# EAGLE board 2016-09-29 (EAGLE 6.6.0)
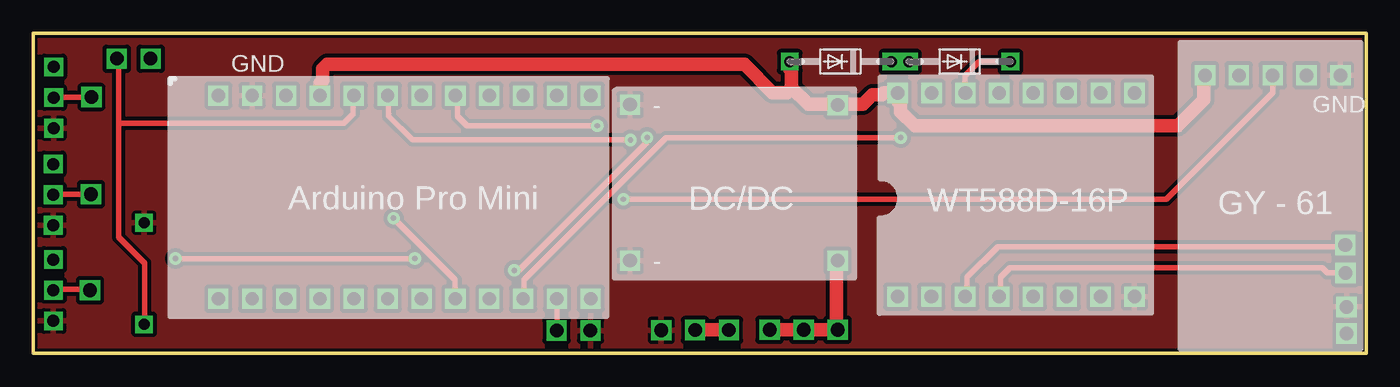
[diagram p0: board, top side]
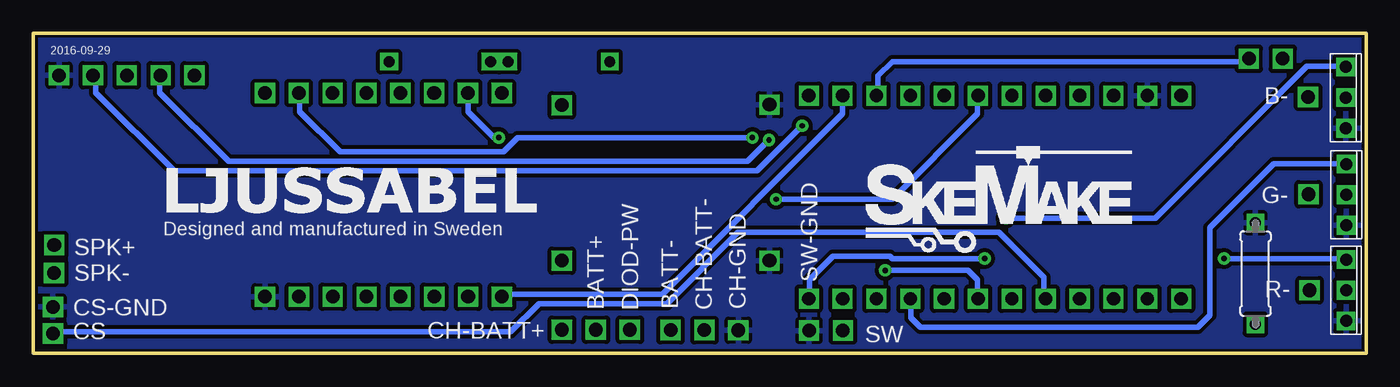
[diagram p1: board, bottom side, seen from below]

Size 100 x 24 mm. Coordinates in mm from the lower left corner, seen from the top.
Outline: 0,0 0,24 100,24 100,0 0,0
Copper layers (1*16): Top 0.035mm / dielectric 1.5mm / Bottom 0.035mm
Design rules "default *": minimum track width 8mil, minimum drill 16mil, track to track 8mil, track to pad 8mil, pad to pad 8mil, via to via 8mil, smd to smd 8mil, copper to edge 8mil, drill to drill 25mil, minimum pad ring 10mil, minimum via ring 10mil, stop-mask expansion 4mil, vias tented up to drill 0mil, thermal gap 10mil
Net classes: 0 default: width 0.406 mm, clearance 0.305 mm; 1 supply: width 1.016 mm, clearance 0.305 mm

## Footprints (pad centres in the part's own frame; a part is rotated, then mirrored left to right if it is on the bottom)
TO-251 = drill 0.9 square: D_2 1.15,3.3; G_1 1.15,5.6; S_3 1.15,1
1X01 = drill 1.016 square: 1 0,0
DO34-7 = drill 0.813 square: A 3.81,0; C -3.81,0
1X08 = drill 1.016 square: 1 -8.89,0; 2 -6.35,0; 3 -3.81,0; 4 -1.27,0; 5 1.27,0; 6 3.81,0; 7 6.35,0; 8 8.89,0
1X02 = drill 1.016 square: 1 -1.27,0; 2 1.27,0
1X05 = drill 1.016 square: 1 -5.08,0; 2 -2.54,0; 3 0,0; 4 2.54,0; 5 5.08,0
0207/7 = drill 0.813 square: 1 -3.81,0; 2 3.81,0
PRO-MINI-2 = drill 1 square: A0 6.35,-5.08; A1 6.35,-2.54; A2 6.35,0; A3 6.35,2.54; D2 -8.89,2.54; D3 -8.89,0; D4 -8.89,-2.54; D5 -8.89,-5.08; D6 -8.89,-7.62; D7 -8.89,-10.16; D8 -8.89,-12.7; D9 -8.89,-15.24; D10 6.35,-15.24; D11 6.35,-12.7; D12 6.35,-10.16; D13 6.35,-7.62; GND 6.35,10.16; GND1 -8.89,5.08; RAW 6.35,12.7; RST 6.35,7.62; RST1 -8.89,7.62; RX1 -8.89,10.16; TX0 -8.89,12.7; VCC 6.35,5.08

## Placement (x,y rotation side)
B  TO-251TH  [TO-251]  2.68,15.88 0 bottom
B-  [1X01]  4.36,19.23 0 top
BATT+  [1X01]  57.79,1.77 0 top
BATT-  [1X01]  52.19,1.74 0 top
CH-BATT+  [1X01]  60.34,1.77 0 top
CH-BATT-  [1X01]  49.65,1.74 0 top
CH-GND  [1X01]  47.11,1.73 0 top
CS  [1X01]  98.53,1.48 0 top
CS-GND  [1X01]  98.53,3.48 0 top
D1  BAT81  [DO34-7]  60.56,21.88 180 top
D2  BAT81  [DO34-7]  69.5,21.88 180 top
DCDC-GND  [1X01]  44.77,18.65 270 top
DCDC-GND2  [1X01]  44.77,6.95 270 top
DCDC-IN+  [1X01]  60.35,6.95 0 top
DCDC-OUT+  [1X01]  60.35,18.61 270 top
DIOD-PW  [1X01]  55.24,1.77 0 top
G  TO-251TH  [TO-251]  2.65,8.6 0 bottom
G-  [1X01]  4.33,11.93 0 top
JP1  [1X08]  73.74,19.52 0 top
JP3  [1X02]  7.53,22.1 180 bottom
JP5  [1X05]  92.99,20.85 0 top
JP8  [1X08]  73.73,4.25 0 top
R  TO-251TH  [TO-251]  2.66,1.43 0 bottom
R1  [0207/7]  8.31,5.98 270 bottom
R-  [1X01]  4.25,4.73 0 top
SPK+  [1X01]  98.43,8.13 0 top
SPK-  [1X01]  98.44,6.03 0 top
SW  [1X01]  39.26,1.71 0 top
SW-GND  [1X01]  41.8,1.71 0 top
U$1  PRO-MINI-2  [PRO-MINI-2]  26.58,12.98 90 top

## Library data of the parts
B G R = egna
B- BATT+ BATT- CH-BATT+ CH-BATT- CH-GND CS CS-GND DCDC-GND DCDC-GND2 DCDC-IN+ DCDC-OUT+ DIOD-PW G- JP1 JP3 JP5 JP8 R- SPK+ SPK- SW SW-GND = pinhead
D1 D2 = diode
R1 = resistor
U$1 = Arduino-clone

## Nets
GND [supply]: B.S_3 CH-GND.1 CS-GND.1 DCDC-GND2.1 DCDC-GND.1 G.S_3 JP5.5 JP8.8 R1.1 R.S_3 SW-GND.1 U$1.GND
N$1: JP1.2 U$1.D7
N$2: JP1.7 U$1.D4
N$3: JP8.1 U$1.D11
N$4: D1.C D2.A
N$5 [supply]: D1.A DCDC-OUT+.1 JP1.1 JP5.1 U$1.VCC
N$6: JP5.2 U$1.A2
N$7 [supply]: BATT+.1 CH-BATT+.1 DCDC-IN+.1 DIOD-PW.1
N$8: JP5.4 U$1.A0
N$9: D2.C JP1.3
N$10 [supply]: BATT-.1 CH-BATT-.1
N$11: R-.1 R.D_2
N$12: R.G_1 U$1.D9
N$13: G.G_1 U$1.D6
N$14: B.G_1 U$1.D5
N$15: JP3.1 R1.2 U$1.A3
N$16: JP3.2 U$1.D12
N$17: G-.1 G.D_2
N$18: B-.1 B.D_2
N$19: JP5.3 U$1.A1
N$20: CS.1 U$1.D2
N$21: SW.1 U$1.D8
N$22: JP8.3 SPK+.1
N$23: JP8.4 SPK-.1

## Tracks (layer width: path | path; a pad name or v marks a point on that pad's centre or on a via)
GND
  pour Bottom: 0,0 100,0 100,24 0,24
  pour Top: 0,0 100,0 100,24 0,24
N$1  (via drill 0.41)
  Top 0.406: v65.08,16.18 47.47,16.18 36.8,5.51 36.8,4.27 U$1.D7
  Bottom 0.406: v65.08,16.18 65.43,16.18 67.39,18.14 67.39,19.38 JP1.2
N$2  (via drill 0.41)
  Top 0.406: v36.09,6.22 36.45,6.22 46.05,15.82 v46.05,16.18
  Bottom 0.406: v36.09,6.22 29.87,6.22 29.16,5.51 29.16,4.27 U$1.D4 | v46.05,16.18 63.65,16.18 64.72,15.11 76.99,15.11 80.01,18.14 80.01,19.38 JP1.7
N$3
  Bottom 0.406: U$1.D11 39.29,19.2 39.29,17.96 52.81,4.45 64.54,4.45 64.72,4.27 JP8.1
N$4
  Top 0.406: D1.C 64.54,22.05 65.61,22.05 D2.A
N$5
  Top 1.016: 56.9,19.91 56.9,21.16 56.72,21.34 56.72,21.87 D1.A | 56.9,19.91 58.14,18.67 60.27,18.67 DCDC-OUT+.1 60.81,18.67 62.23,18.67 62.94,19.38 63.65,19.38 63.83,19.56 64.72,19.56 JP1.1 64.9,19.02 64.9,18.85 65.08,18.67 65.08,18.14 66.14,17.07 85.88,17.07 87.83,19.02 87.83,20.8 JP5.1 | U$1.VCC 21.51,19.38 21.51,20.27 21.69,20.45 21.69,21.34 22.05,21.69 53.34,21.69 55.47,19.56 56.54,19.56 56.9,19.91
N$6  (via drill 0.41)
  Top 0.406: v44.81,16 28.45,16 26.67,17.78 26.67,19.2 U$1.A2
  Bottom 0.406: v44.81,16 46.41,14.4 85.34,14.4 90.5,19.56 90.5,20.8 JP5.2
N$7
  Top 1.016: DIOD-PW.1 55.3,1.78 56.19,1.78 56.36,1.78 56.72,1.78 56.9,1.78 BATT+.1 58.14,1.78 58.67,1.78 58.85,1.78 59.21,1.78 59.38,1.78 60.27,1.78 CH-BATT+.1 60.27,2.13 60.27,6.93 DCDC-IN+.1
N$8  (via drill 0.41)
  Top 0.406: v42.32,17.07 32.54,17.07 31.83,17.78 31.83,19.2 U$1.A0
  Bottom 0.406: v42.32,17.07 45.7,13.69 89.43,13.69 95.3,19.56 95.3,20.62 95.48,20.8 JP5.4
N$9
  Top 0.406: D2.C 73.25,21.87 70.94,21.87 69.88,20.8 69.88,19.56 JP1.3
N$10
  Top 1.016: CH-BATT-.1 49.78,1.78 50.67,1.78 50.76,1.78 51.12,1.78 51.38,1.78 51.92,1.78 52.09,1.96 52.27,1.78 BATT-.1
N$11
  Top 0.406: R.D_2 1.6,4.8 4.09,4.8 R-.1
N$12  (via drill 0.41)
  Top 0.406: v28.63,7.11 v10.67,7.11
  Bottom 0.406: v10.67,7.11 1.6,7.11 R.G_1 | v28.63,7.11 35.56,7.11 35.74,7.29 40.01,7.29 41.78,5.51 41.78,4.27 U$1.D9
N$13
  Bottom 0.406: G.G_1 1.6,14.22 6.93,14.22 11.73,9.42 11.73,2.85 12.62,1.96 33.43,1.96 34.14,2.67 34.14,4.09 U$1.D6
N$14  (via drill 0.41)
  Top 0.406: v27.03,10.13 31.65,5.51 31.65,4.27 U$1.D5
  Bottom 0.406: v27.03,10.13 15.82,10.13 4.45,21.51 1.6,21.51 B.G_1
N$15
  Top 0.406: 6.4,17.25 6.4,22.05 JP3.1 | 6.4,17.25 6.4,8.71 8.36,6.76 8.36,2.31 R1.2 | 6.4,17.25 23.29,17.25 24,17.96 24,19.2 U$1.A3
N$16
  Bottom 0.406: U$1.D12 36.63,19.38 36.63,20.8 35.56,21.87 9.07,21.87 8.89,22.05 JP3.2
N$17
  Top 0.406: G.D_2 1.6,11.91 4.27,11.91 G-.1
N$18
  Top 0.406: B.D_2 1.6,19.2 4.27,19.2 B-.1
N$19  (via drill 0.41)
  Top 0.406: v44.27,11.56 84.99,11.56 92.99,19.56 92.99,20.8 JP5.3
  Bottom 0.406: v44.27,11.56 35.56,11.56 29.16,17.96 29.16,19.2 U$1.A1
N$20
  Bottom 0.406: U$1.D2 24.18,4.27 24.18,5.69 27.56,9.07 47.12,9.07 52.45,3.73 62.05,3.73 64.19,1.6 98.5,1.6 CS.1
N$21
  Top 0.406: U$1.D8 39.29,4.09 39.29,1.78 SW.1
N$22
  Top 0.406: JP8.3 70.05,4.27 70.05,5.69 72.36,8 98.32,8 SPK+.1
N$23
  Top 0.406: JP8.4 72.54,4.27 72.54,5.69 73.25,6.4 96.72,6.4 97.08,6.04 98.32,6.04 SPK-.1

## Text on the board
tNames: GND | - | GND | Arduino Pro Mini | DC/DC | WT588D-16P | GY - 61 | - | E:/Pics/ljussabel-mono.bmp
bNames: 2016-09-29 | Designed and manufactured in Sweden